# Altium PCB DAC8541 PCB.pcbdoc
Units mil, origin at the board's own origin, x right, y up, seen from the top; angles counter-clockwise.
Board outline 6000 x 4000 mil, 2 copper layers (Top Layer, Bottom Layer); 18 components, 33 nets, 93 pads, 0 vias.
Unrouted connection lines stored in the file: 59.
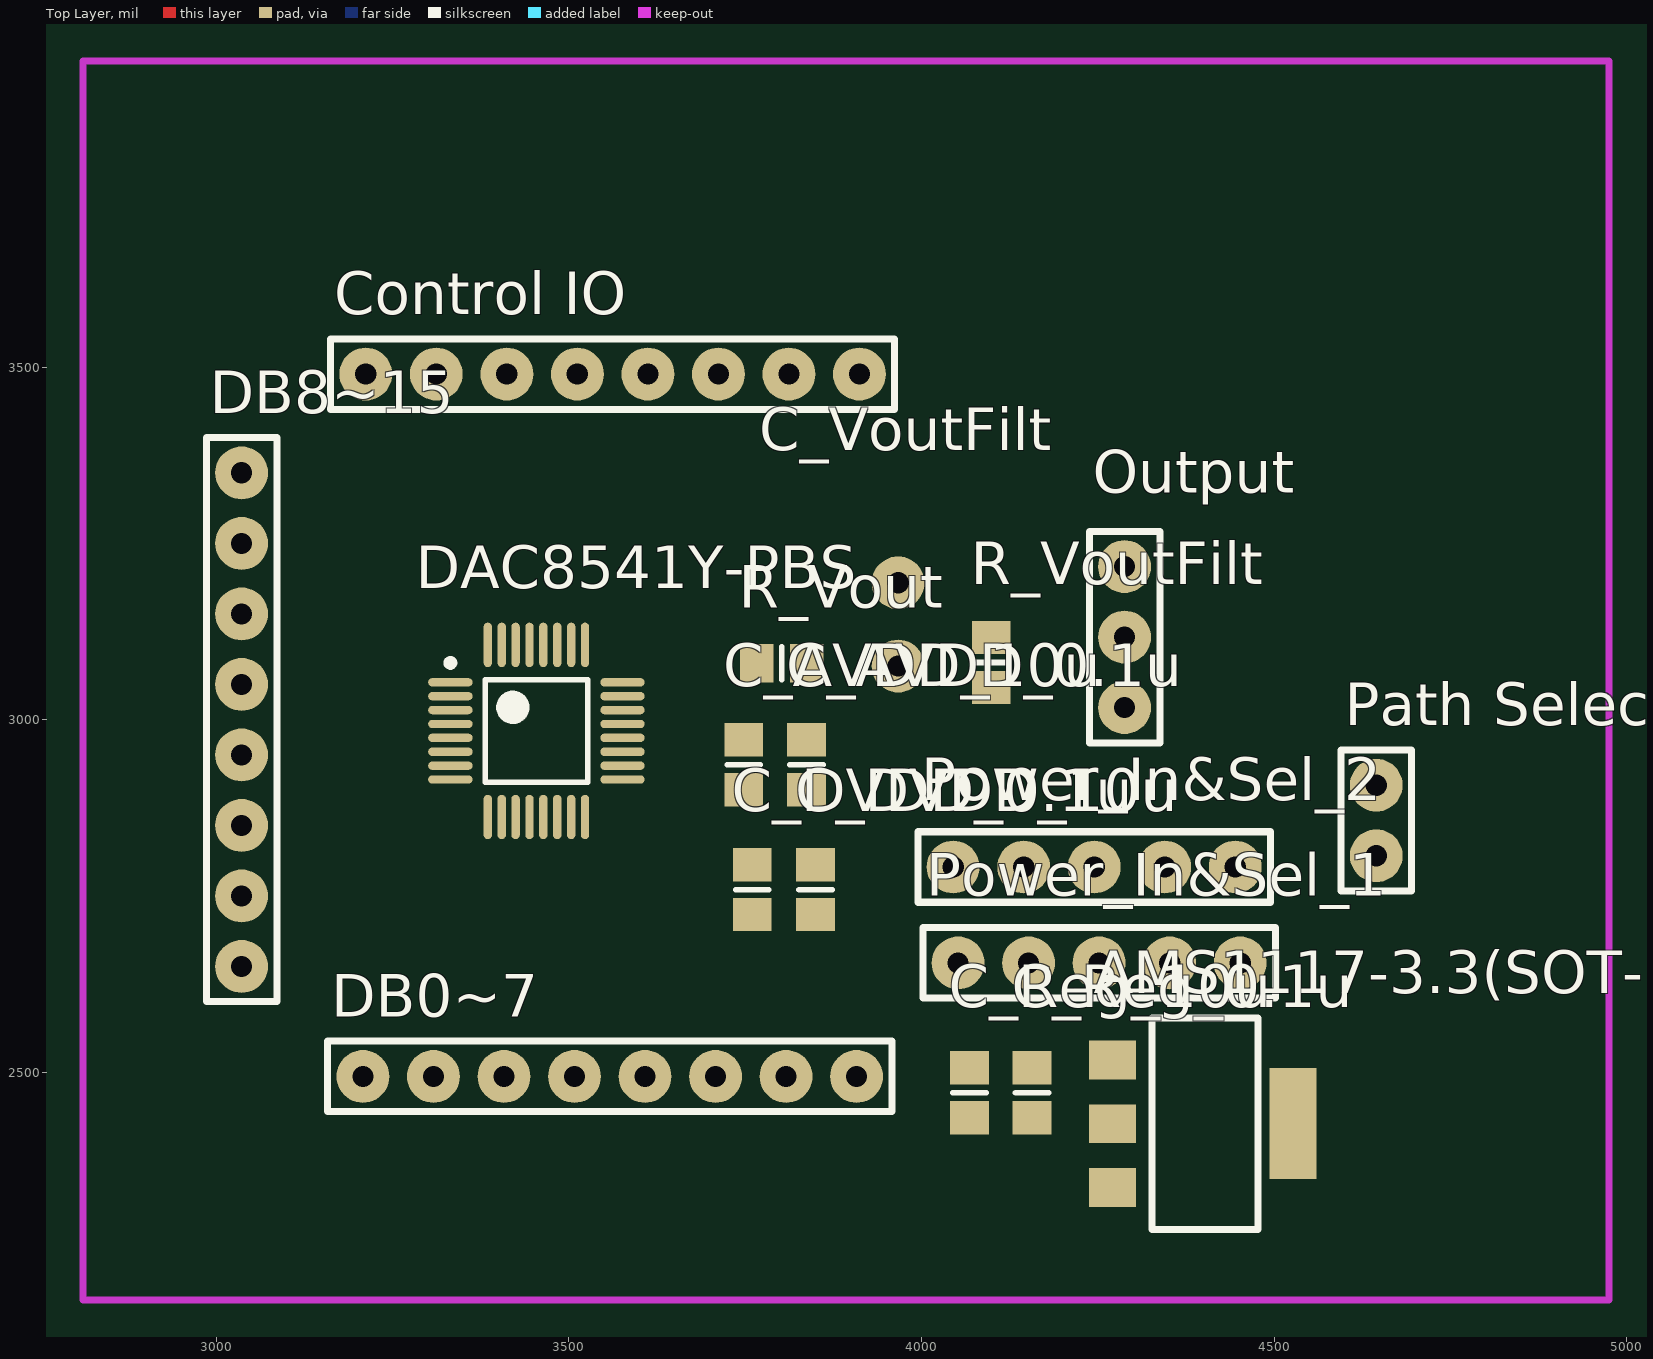
[diagram p0: Top Layer view]
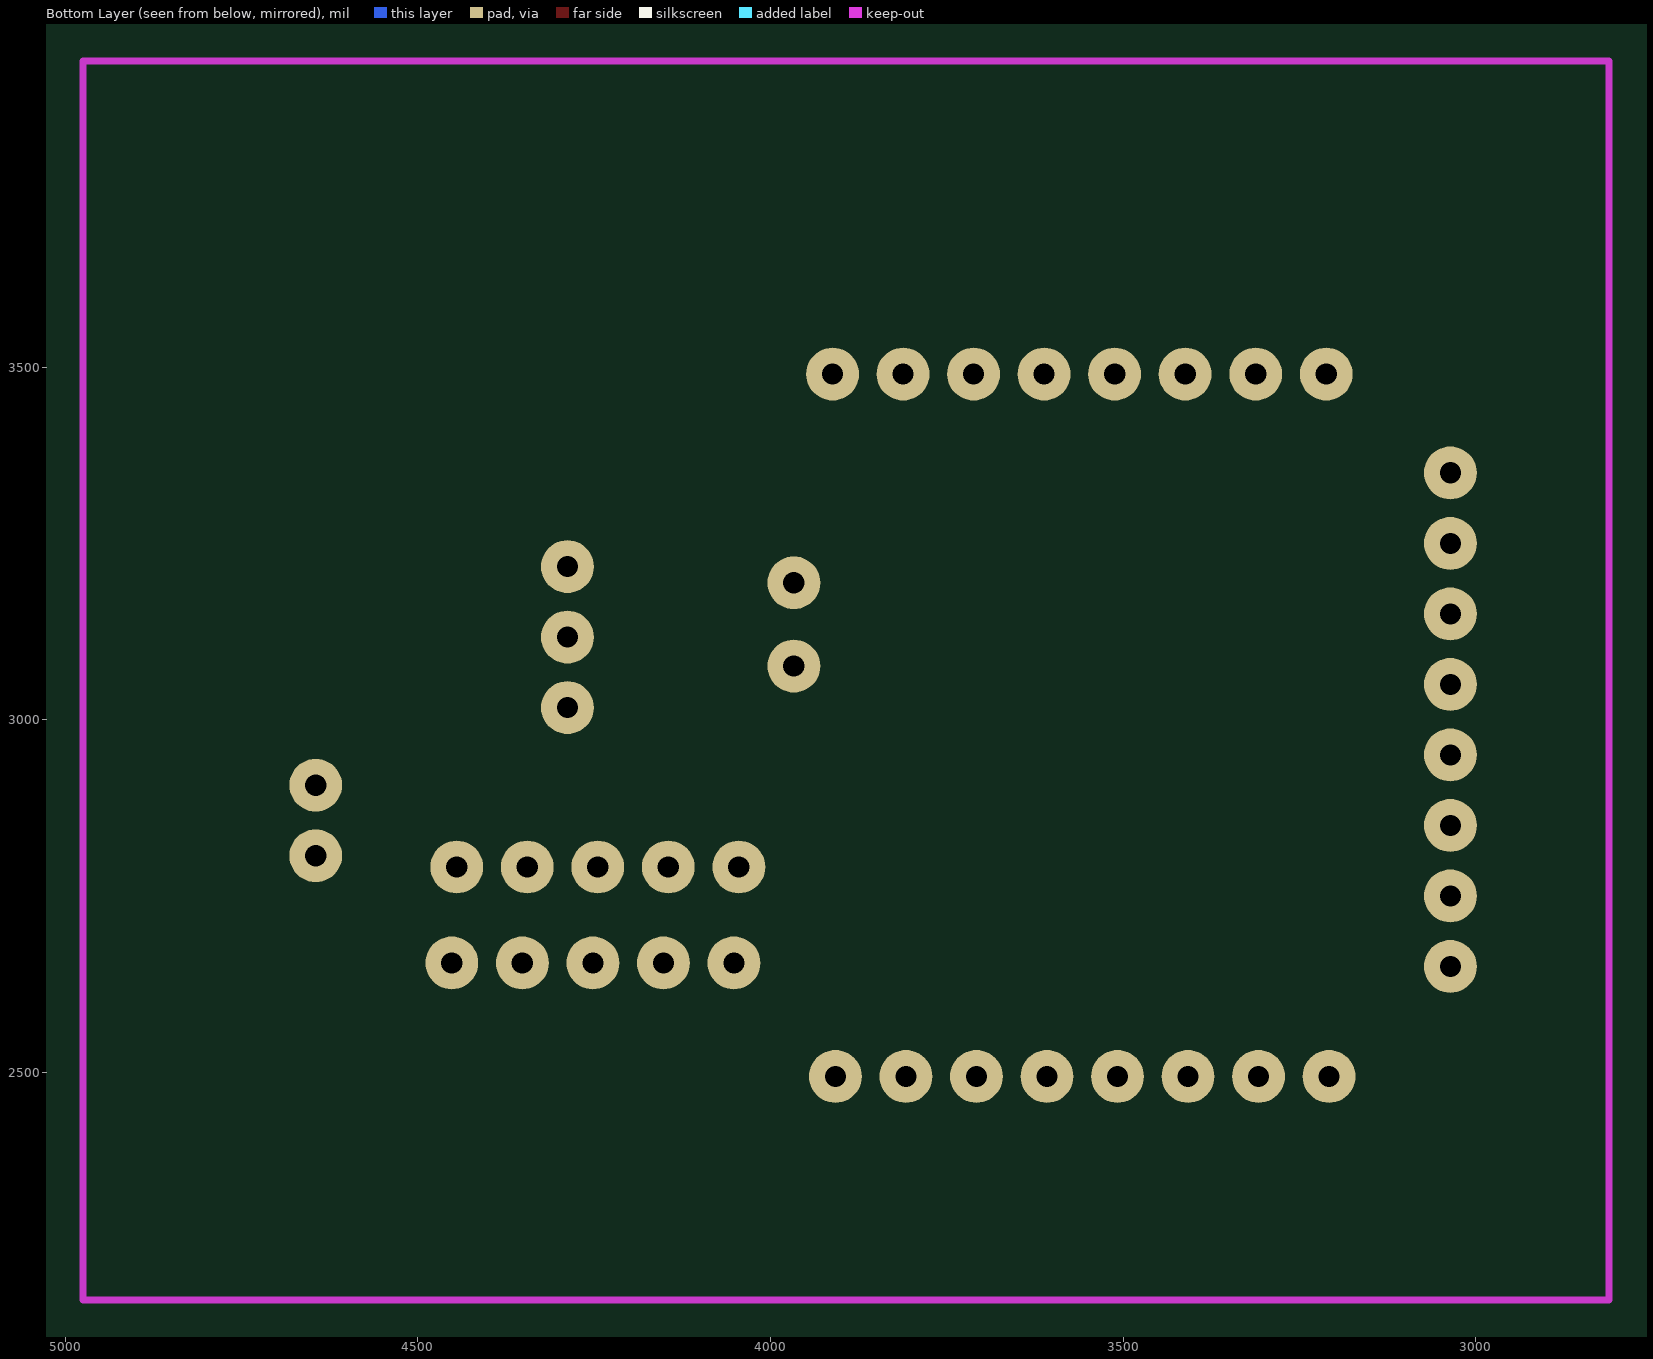
[diagram p1: Bottom Layer view, seen from below]

## Layer stack, top to bottom
Top Layer: signal copper 1.4
Dielectric: dielectric 12.6, FR-4, Dk 4.8
Bottom Layer: signal copper 1.4

## Board outline
1000,1000 7000,1000 7000,5000 1000,5000

## Design rules (kind name [scope] priority, off if disabled: settings)
Clearance [All] p1: gap=8
PolygonConnect [All] p1: connectstyle=Relief reliefconductorwidth=10 reliefentries=4 polygonreliefangle="90 Angle"
RoutingCorners [All] p1: cornerstyle=Round minsetback=100 maxsetback=100
RoutingLayers [All] p1: top layer_v5=TRUE bottom layer_v5=FALSE
RoutingVias [All] p1: holewidth=28 width=50 viastyle="Through Hole" minholewidth=28 minwidth=50 maxholewidth=28 maxwidth=50
SilkscreenOverComponentPads [All] p1: minsilkscreentomaskgap=10
SolderMaskExpansion [All] p1: expansion=4
Width [All] p1: maxlimit=9.84 minlimit=9.84 preferedwidth=9.84
25 further rules are at their usual default settings.

## Components (designator, comment, footprint, x,y, rotation, side; value= is the part's Value field where it differs from the comment)
AMS1117-3.3(SOT-223) "AMS1117-3.3(SOT-223)" SOT-223 4527,2427 r270 top
C_AVDD_0.1u "Cap" 6-0805_N 3837,2936 r270 top
C_AVDD_10u "Cap" 6-0805_N 3748,2936 r270 top
C_DVDD_0.1u "Cap" 6-0805_N 3760,2759 r90 top
C_DVDD_10u "Cap" 6-0805_N 3850,2759 r90 top
C_Reg_0.1u "Cap" 6-0805_N 4157,2471 r270 top
C_Reg_10u "Cap" 6-0805_N 4068,2471 r270 top
C_VoutFilt "Cap Pol1" C_SolidCap_270uF16V 3967,3135 r270 top
"Control IO" "Header 8H" Header8pin 3212,3490 r0 top
DAC8541Y-PBS "DAC8541Y-PBS" TSQFP50P700X700X120-32N 3454,2984 r0 top
DB0~7 "Header 8H" Header8pin 3908,2494 r180 top
DB8~15 "Header 8H" Header8pin 3036,2650 r90 top
Output "Header 3H" header3pin 4288,3217 r270 top
"Path Selector" "Header 2" header2pin 4645,2807 r90 top
Power_In&Sel_1 "Header 5" header5pin 4452,2655 r180 top
Power_In&Sel_2 "Header 5" header5pin 4445,2791 r180 top
R_Vout "Res1" 6-0805_N 3802,3080 r180 top
R_VoutFilt "Res1" 6-0805_N 4099,3081 r90 top

## Footprints (in the part's own frame and the unit in brackets; to place one, negate y for a bottom-side part, rotate by r counter-clockwise, add the part's x,y. Pads: shape width x height; smd on the part's side, far side on the other; paste and mask are expansions set on the pad)
6-0805_N [mm] "Chip Resistor, Body 2.0x1.2mm, IPC Medium Density"
  rect 1.2x1.4 smd: 1(-0.9,0) 2(0.9,0)
  silkscreen extent 0,-0.6 0,0.6, body extent -1.07,-0.7 1.07,0.7, height 0.7
C_SolidCap_270uF16V [mil]
  round 75 hole 30: 1(-59.06,0) 2(59.06,0)
header2pin [mil]
  round 75 hole 30: 1(0,0) 2(100,0)
  silkscreen extent -50,-50 150,50
header3pin [mil]
  round 75 hole 30: 1(0,0) 2(100,0) 3(200,0)
  silkscreen extent -50,-50 250,50
header5pin [mil]
  round 75 hole 30: 1(0,0) 2(100,0) 3(200,0) 4(300,0) 5(400,0)
  silkscreen extent -50,-50 450,50
Header8pin [mil]
  round 75 hole 30: 1(0,0) 2(100,0) 3(200,0) 4(300,0) 5(400,0) 6(500,0) 7(600,0) 8(700,0)
  silkscreen extent -50,-50 750,50
SOT-223 [mm]
  rect 1.4x1.7 smd: 1(-2.3,-6.5) 2(0,-6.5) 3(2.3,-6.5)
  rect 4x1.7 smd: 4(0,0)
  silkscreen extent -3.81,-5.08 3.81,-1.27
TSQFP50P700X700X120-32N [mm] "TSQFP, 32-Leads, Body 7.1x7.1mm (max), Pitch 0.50mm, IPC Medium Density"
  oval 1.6x0.3 smd: 1(-3.1,1.75) 2(-3.1,1.25) 3(-3.1,0.75) 4(-3.1,0.25) 5(-3.1,-0.25) 6(-3.1,-0.75) 7(-3.1,-1.25) 8(-3.1,-1.75) 17(3.1,-1.75) 18(3.1,-1.25) 19(3.1,-0.75) 20(3.1,-0.25) 21(3.1,0.25) 22(3.1,0.75) 23(3.1,1.25) 24(3.1,1.75)
  oval 0.3x1.6 smd: 9(-1.75,-3.1) 10(-1.25,-3.1) 11(-0.75,-3.1) 12(-0.25,-3.1) 13(0.25,-3.1) 14(0.75,-3.1) 15(1.25,-3.1) 16(1.75,-3.1) 25(1.75,3.1) 26(1.25,3.1) 27(0.75,3.1) 28(0.25,3.1) 29(-0.25,3.1) 30(-0.75,3.1) 31(-1.25,3.1) 32(-1.75,3.1)
  silkscreen extent -3.22,-1.85 1.85,2.57, body extent -2.5,-2.5 2.5,2.5, height 1.2

## Part data
C_AVDD_0.1u C_AVDD_10u C_DVDD_0.1u C_DVDD_10u C_Reg_0.1u C_Reg_10u: "Capacitor"
C_VoutFilt: "Polarized Capacitor (Radial)"
"Control IO" DB0~7 DB8~15: "Header, 8-Pin, Right Angle"
Output: "Header, 3-Pin, Right Angle"
"Path Selector": "Header, 2-Pin"
Power_In&Sel_1 Power_In&Sel_2: "Header, 5-Pin"
R_Vout R_VoutFilt: "Resistor"

## Nets (pads, with @x,y where several pads share a name; then routed paths per layer and width w, separated by ;. In a path a pad name is that pad's centre, name@x,y a point inside that pad or via, vN(x,y) a via of type N, cw(c..) or ccw(c..) an arc to the next point about the centre after c; other vN are vias at no path point)
AREG: AMS1117-3.3(SOT-223).3 C_Reg_0.1u.2 C_Reg_10u.2 Power_In&Sel_2.3
ASRC: Power_In&Sel_1.3 Power_In&Sel_2.2
AVDD: "Path Selector.2" C_AVDD_0.1u.2 C_AVDD_10u.2 DAC8541Y-PBS.19 DAC8541Y-PBS.20 Power_In&Sel_2.1
DVDD: C_DVDD_0.1u.2 C_DVDD_10u.2 DAC8541Y-PBS.18 Power_In&Sel_1.4 Power_In&Sel_1.5
GND: AMS1117-3.3(SOT-223).1 C_AVDD_0.1u.1 C_AVDD_10u.1 C_DVDD_0.1u.1 C_DVDD_10u.1 C_Reg_0.1u.1 C_Reg_10u.1 DAC8541Y-PBS.17 DAC8541Y-PBS.21 DAC8541Y-PBS.22 Output.3 Power_In&Sel_2.4 Power_In&Sel_2.5 R_Vout.1 R_VoutFilt.1
"NetControl IO_1": "Control IO.1" DAC8541Y-PBS.32
"NetControl IO_2": "Control IO.2" DAC8541Y-PBS.31
"NetControl IO_3": "Control IO.3" DAC8541Y-PBS.30
"NetControl IO_4": "Control IO.4" DAC8541Y-PBS.29
"NetControl IO_5": "Control IO.5" DAC8541Y-PBS.28
"NetControl IO_6": "Control IO.6" DAC8541Y-PBS.27
"NetControl IO_7": "Control IO.7" DAC8541Y-PBS.26
"NetControl IO_8": "Control IO.8" DAC8541Y-PBS.25
NetDAC8541Y-PBS_1: DAC8541Y-PBS.1 DB8~15.8
NetDAC8541Y-PBS_2: DAC8541Y-PBS.2 DB8~15.7
NetDAC8541Y-PBS_3: DAC8541Y-PBS.3 DB8~15.6
NetDAC8541Y-PBS_4: DAC8541Y-PBS.4 DB8~15.5
NetDAC8541Y-PBS_5: DAC8541Y-PBS.5 DB8~15.4
NetDAC8541Y-PBS_6: DAC8541Y-PBS.6 DB8~15.3
NetDAC8541Y-PBS_7: DAC8541Y-PBS.7 DB8~15.2
NetDAC8541Y-PBS_8: DAC8541Y-PBS.8 DB8~15.1
NetDAC8541Y-PBS_9: DAC8541Y-PBS.9 DB0~7.8
NetDAC8541Y-PBS_10: DAC8541Y-PBS.10 DB0~7.7
NetDAC8541Y-PBS_11: DAC8541Y-PBS.11 DB0~7.6
NetDAC8541Y-PBS_12: DAC8541Y-PBS.12 DB0~7.5
NetDAC8541Y-PBS_13: DAC8541Y-PBS.13 DB0~7.4
NetDAC8541Y-PBS_14: DAC8541Y-PBS.14 DB0~7.3
NetDAC8541Y-PBS_15: DAC8541Y-PBS.15 DB0~7.2
NetDAC8541Y-PBS_16: DAC8541Y-PBS.16 DB0~7.1
NetPower_In&Sel_1_1: Power_In&Sel_1.1 Power_In&Sel_1.2
REGOUT: "Path Selector.1" AMS1117-3.3(SOT-223).4
VOUT: C_VoutFilt.1 DAC8541Y-PBS.23 DAC8541Y-PBS.24 Output.1 R_Vout.2
VOUTFILT: C_VoutFilt.2 Output.2 R_VoutFilt.2
pads on no net: AMS1117-3.3(SOT-223).2

## Keep-outs
Keep-Out Layer:
  lines w10: 2811,2177 2811,3934 4975,3934 4975,2177 2811,2177